# Altium PCB BT840_Temp.PcbDoc
Units mm, origin at the board's own origin, x right, y up, seen from the top; angles counter-clockwise.
Board outline 40 x 40 mm, 2 copper layers (Top Layer, Bottom Layer); 14 components, 10 nets, 93 pads, 2 vias.
Unrouted connection lines stored in the file: 2.
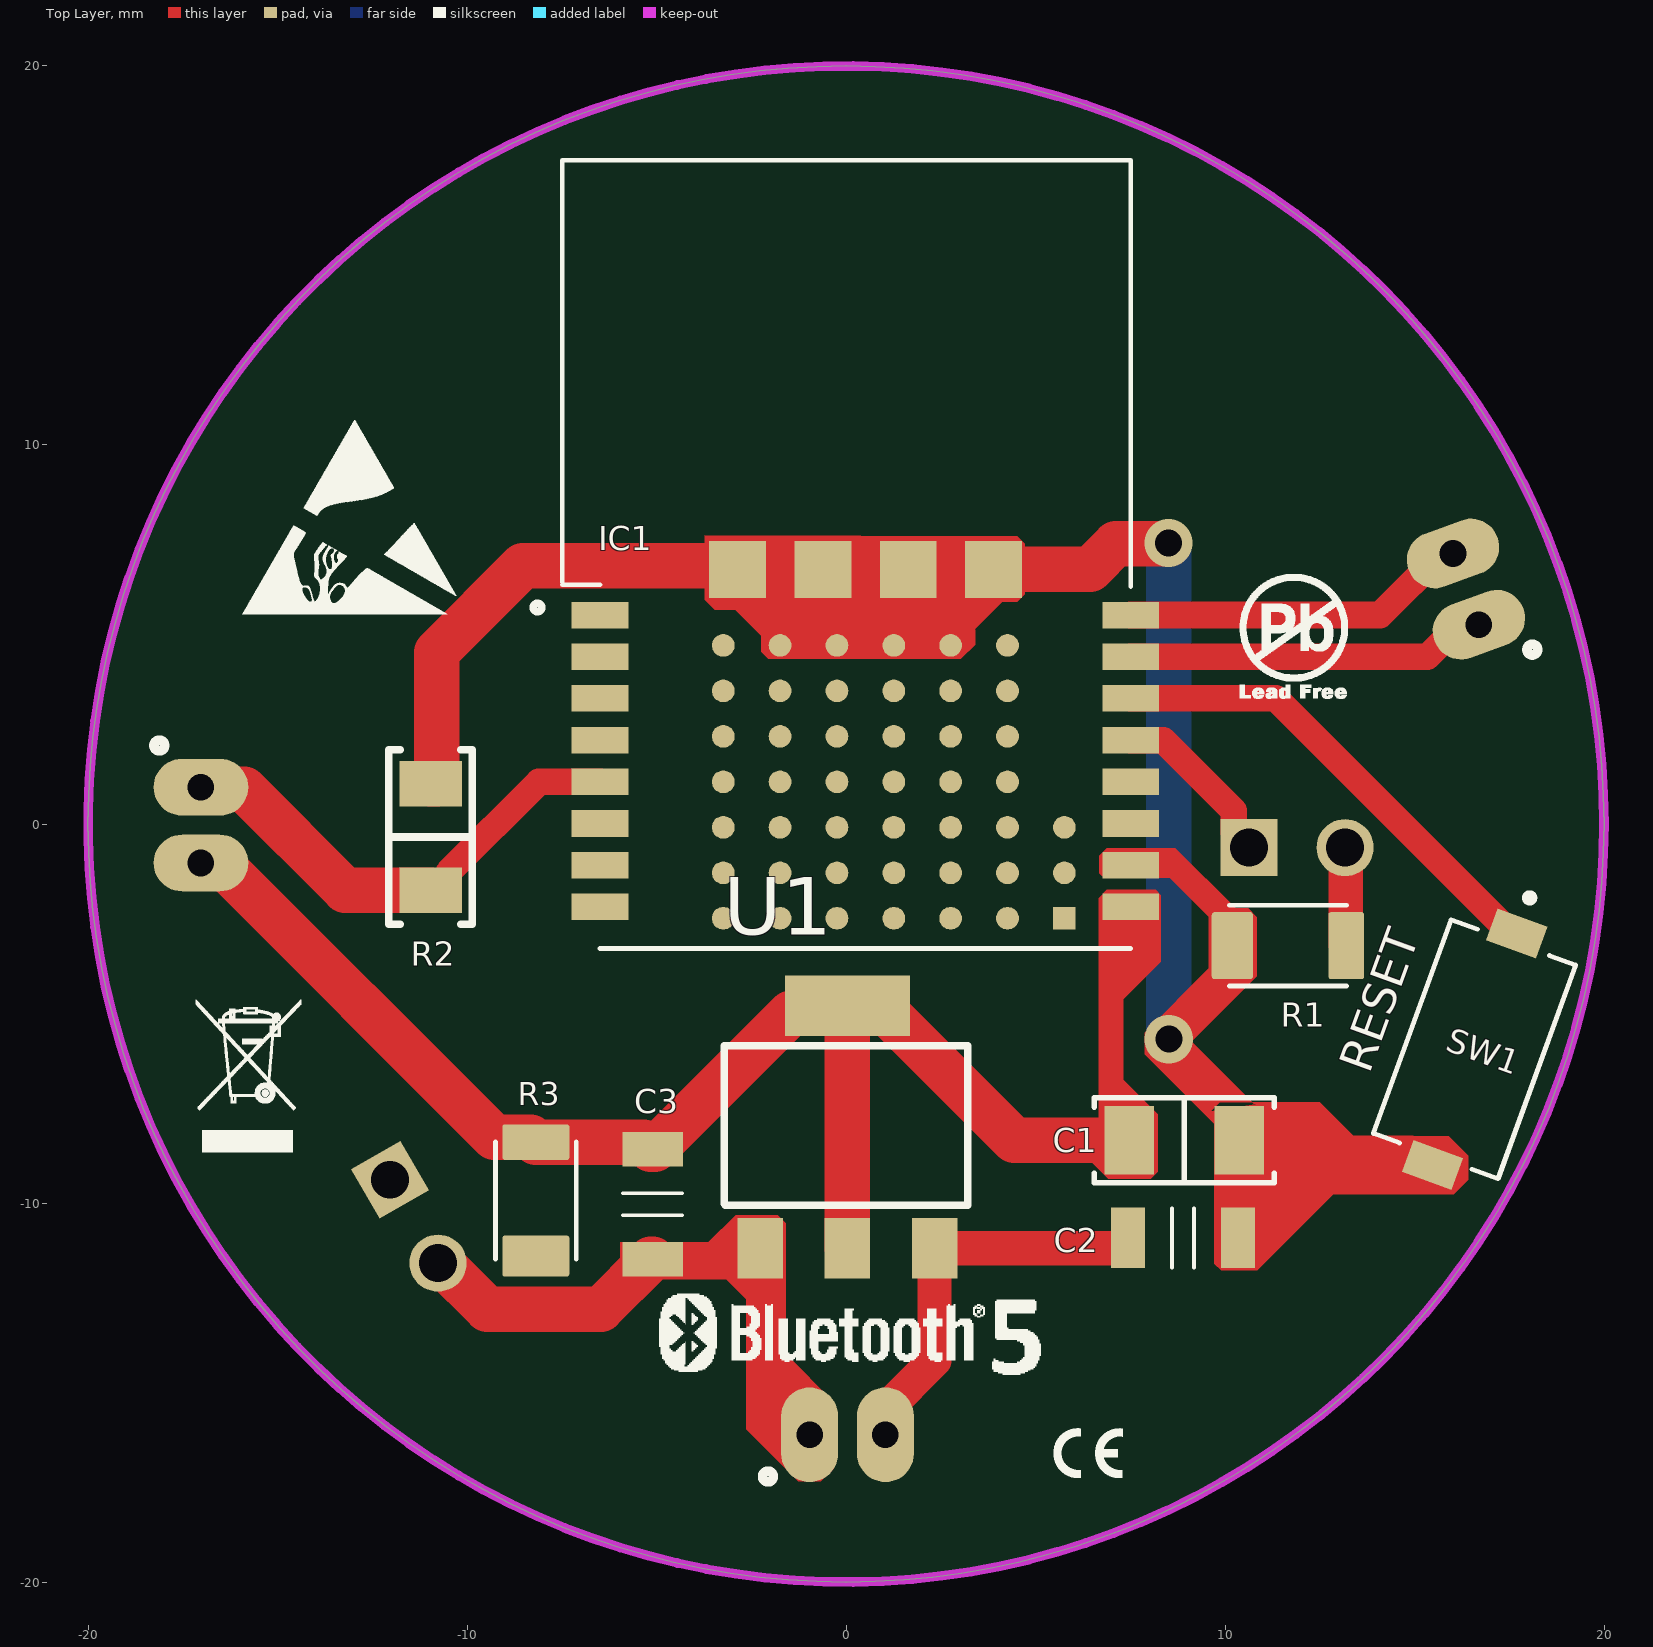
[diagram p0: Top Layer view]
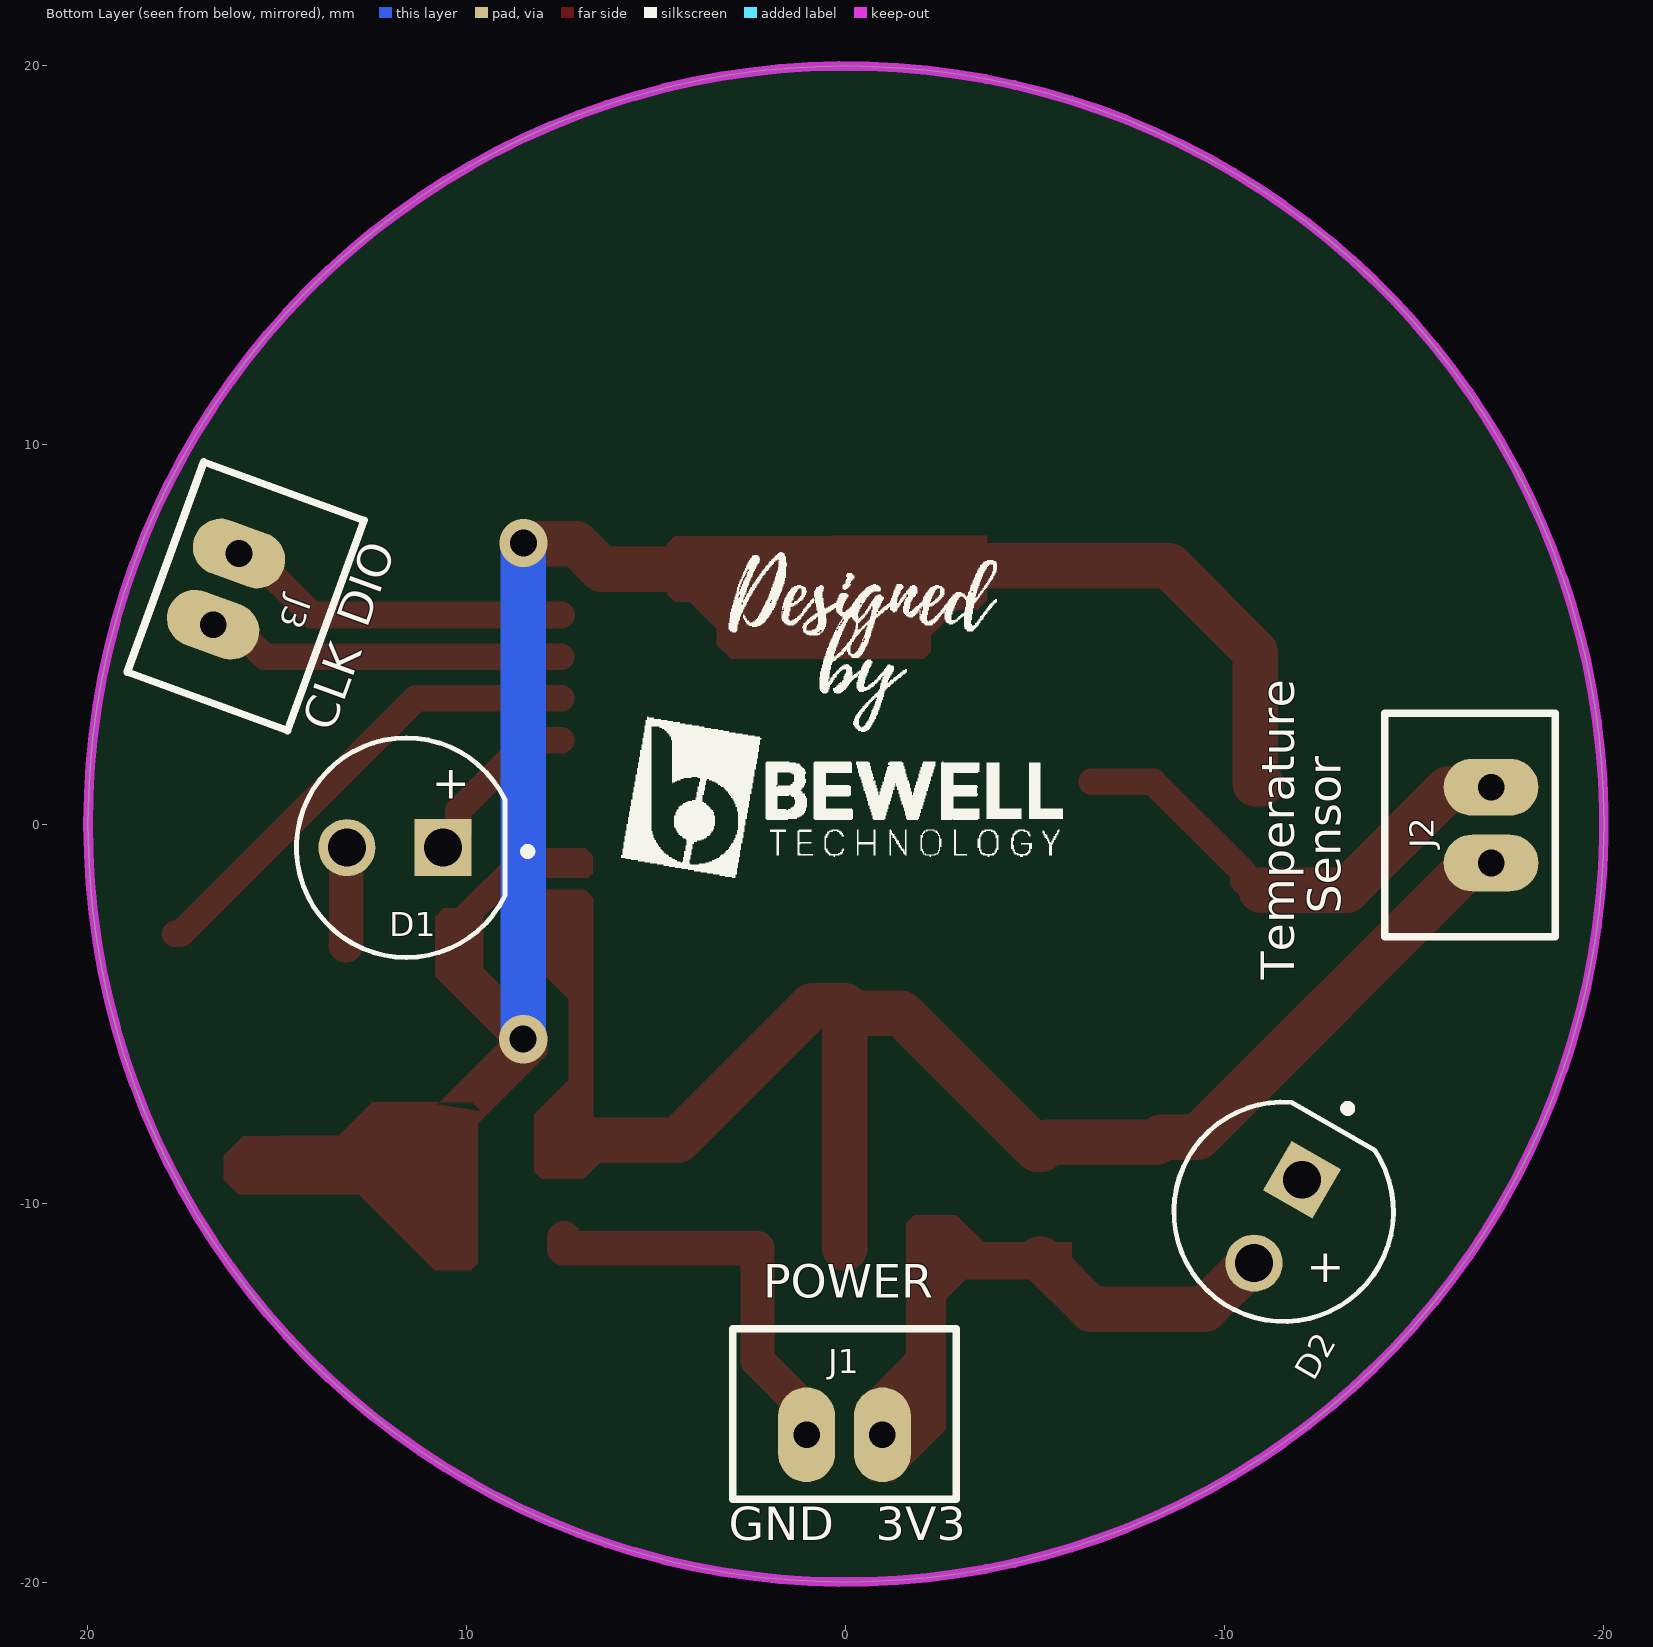
[diagram p1: Bottom Layer view, seen from below]
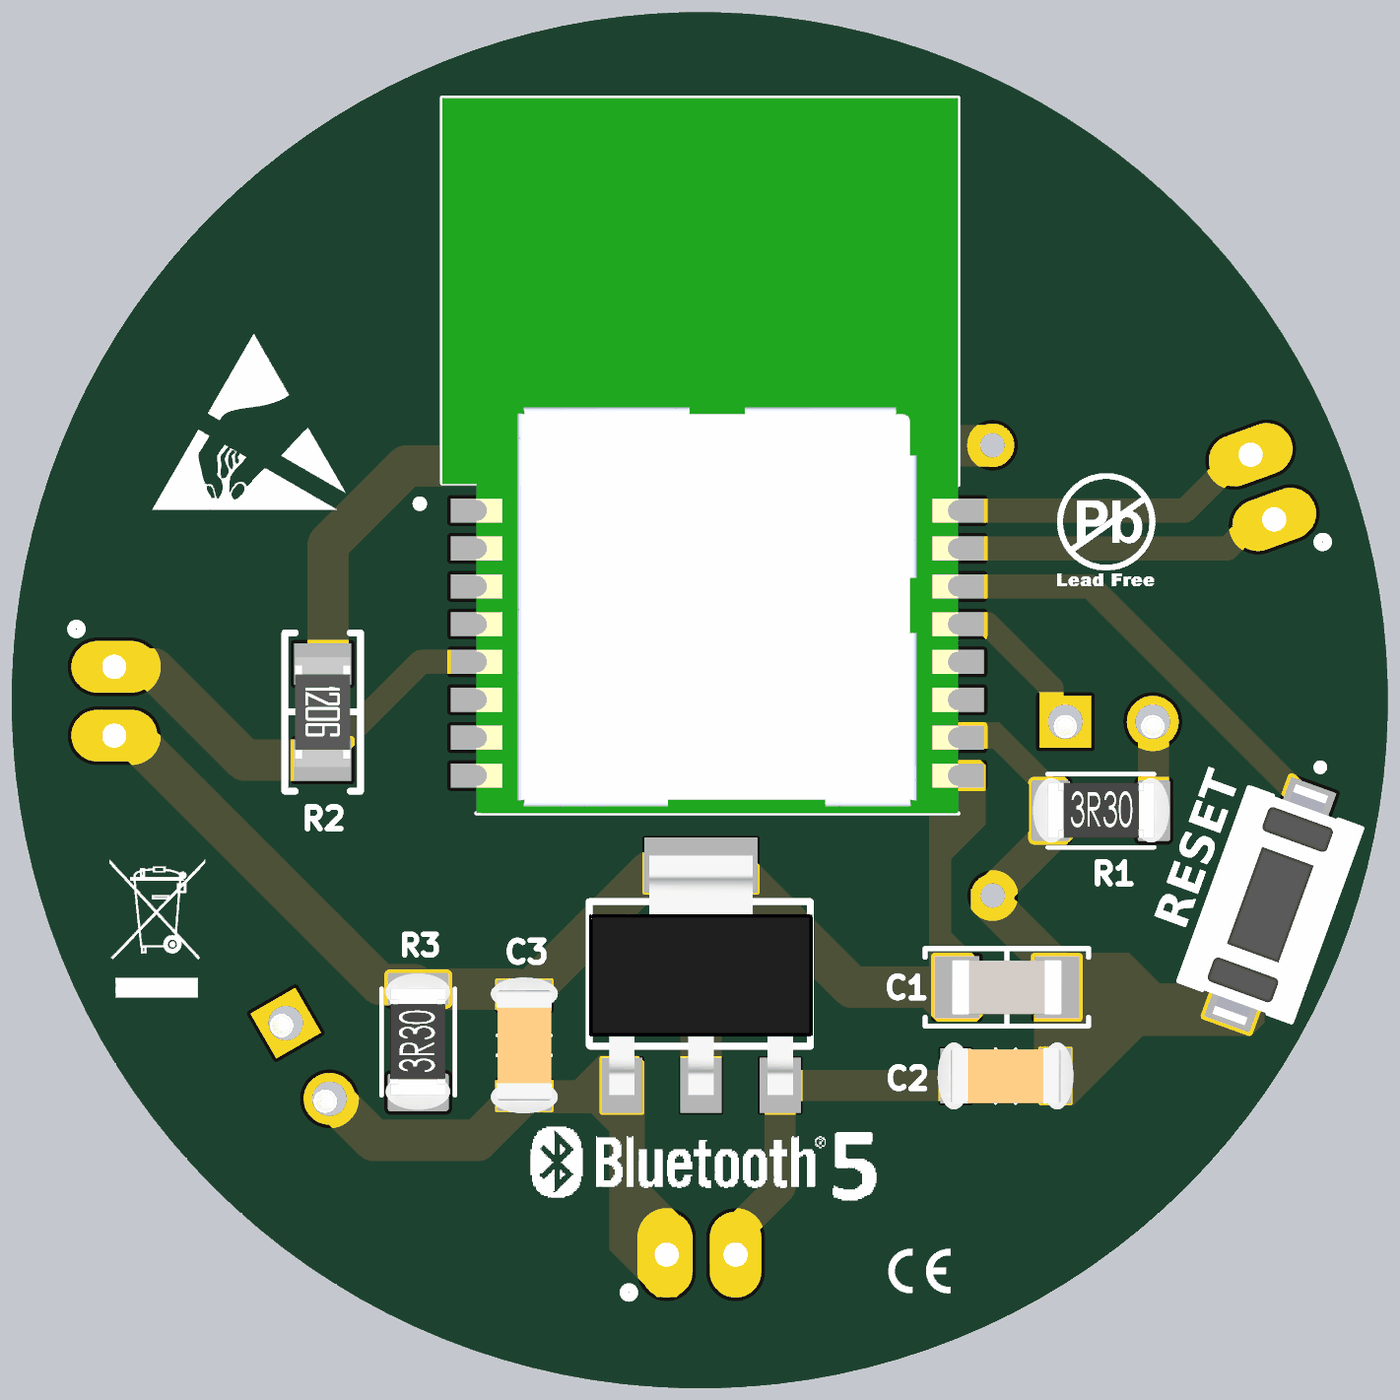
[diagram p2: 3D render of the assembled board from above, using the file's embedded part models]
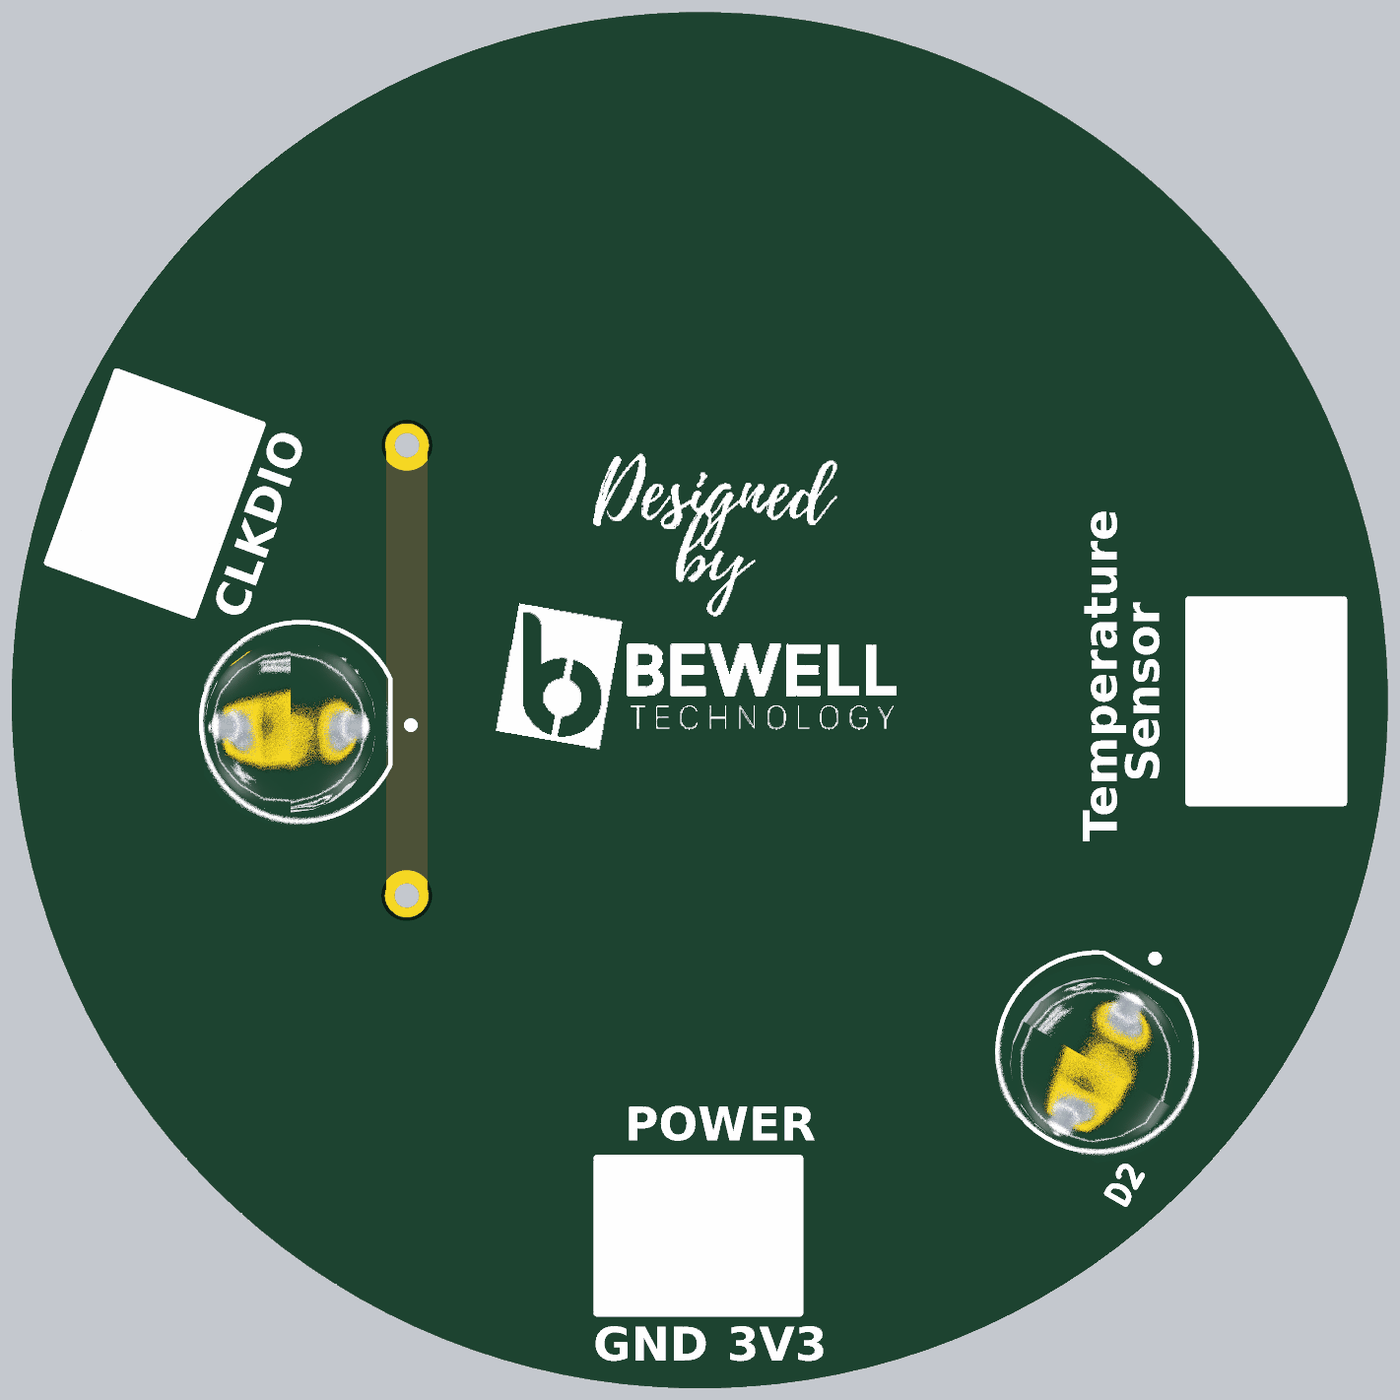
[diagram p3: 3D render of the assembled board from below, using the file's embedded part models]

## Layer stack, top to bottom
Top Solder: solder mask 0.0102, Solder Resist, Dk 3.5
Top Layer: signal copper 0.0356
Dielectric 1: dielectric 0.32, FR-4, Dk 4.8
Bottom Layer: signal copper 0.0356
Bottom Solder: solder mask 0.0102, Solder Resist, Dk 3.5

## Board outline
-20.012,0 ccw(c-0.012,0) -0.012,-20 ccw(c-0.012,0) 19.988,0 ccw(c-0.012,0) -0.012,20 ccw(c-0.012,0)

## Design rules (kind name [scope] priority, off if disabled: settings)
Clearance [All] p1: gap=0.254 ignorepadtopadclearanceinfootprint=FALSE except(0: Arc-Hole Track-Hole SMDPad-Hole THPad-Hole Via-Hole Fill-Hole Poly-Hole Region-Hole Text-Hole)
PolygonConnect [All] p1: connectstyle=Relief reliefconductorwidth=0.254 reliefentries=4 polygonreliefangle="90 Angle" airgapwidth=0.254
RoutingVias [All] p1: holewidth=0.711 width=1.27 viastyle="Through Hole" minholewidth=0.1 minwidth=0.1 maxholewidth=5 maxwidth=5
SolderMaskExpansion [All] p1: expansion=0.102 istentingtop=FALSE
Width [All] p1: maxlimit=20 minlimit=0.254 preferedwidth=0.254 minimp=50.000000 maximp=50.000000 favimp=50.000000
30 further rules are at their usual default settings.

## Components (designator, comment, footprint, x,y, rotation, side; value= is the part's Value field where it differs from the comment)
C1 "47µF" "CAP 1206_3216 - 1.8MM" 8.915,-8.344 r180 top
C2 "C1206C106J4RAC7800" CAP_1206 8.878,-10.921 r180 top
C3 "C1206C106J4RAC7800" CAP_1206 -5.111,-10.033 r90 top
D1 "LED TH" TH_LED 11.887,-0.624 r0 bottom
D2 "LED TH" TH_LED -11.411,-10.486 r300 bottom
IC1 "BT480F" BT840F 0,7.113 r0 top
J1 "B2B-PH-K-S(LF)(SN)" "JST B2B-PH-K" 0.029,-16.116 r0 bottom
J2 "B2B-PH-K-S(LF)(SN)" "JST B2B-PH-K" -17.031,-0.029 r270 bottom
J3 "B2B-PH-K-S(LF)(SN)" "JST B2B-PH-K" 16.346,6.197 r110 bottom
R1 "RT1206BRD07300RL" RES_1206 11.659,-3.2 r0 top
R2 "100 kOhms" "RES 1206_3216" -10.973,-0.343 r270 top
R3 "RT1206BRD07300RL" RES_1206 -8.205,-9.924 r90 top
SW1 "PTS636 SM43J SMTR LFS" SMD_Button 16.573,-5.944 r250 top
U1 "AMS1117-3.3V" SOT223 -0.015,-8.025 r0 top

## Footprints (in the part's own frame and the unit in brackets; to place one, negate y for a bottom-side part, rotate by r counter-clockwise, add the part's x,y. Pads: shape width x height; smd on the part's side, far side on the other; paste and mask are expansions set on the pad)
BT840F [mm]
  rect 1.5x0.7 smd: 1(-6.5,-1.6) 2(-6.5,-2.7) 3(-6.5,-3.8) 4(-6.5,-4.9) 5(-6.5,-6) 6(-6.5,-7.1) 7(-6.5,-8.2) 8(-6.5,-9.3) 9(7.5,-9.3) 10(7.5,-8.2) 11(7.5,-7.1) 12(7.5,-6) 13(7.5,-4.9) 14(7.5,-3.8) 15(7.5,-2.7) 16(7.5,-1.6)
  round 0.6 smd: A0(-1.75,-2.4) A1(-1.75,-3.6) A2(-1.75,-4.8) A3(-1.75,-6) A4(-1.75,-7.2) A5(-1.75,-8.4) A6(-1.75,-9.6) B0(-0.25,-2.4) B1(-0.25,-3.6) B2(-0.25,-4.8) B3(-0.25,-6) B4(-0.25,-7.2) B5(-0.25,-8.4) B6(-0.25,-9.6) C0(1.25,-2.4) C1(1.25,-3.6) C2(1.25,-4.8) C3(1.25,-6) C4(1.25,-7.2) C5(1.25,-8.4) C6(1.25,-9.6) D0(2.75,-2.4) D1(2.75,-3.6) D2(2.75,-4.8) D3(2.75,-6) D4(2.75,-7.2) D5(2.75,-8.4) D6(2.75,-9.6) E0(4.25,-2.4) E1(4.25,-3.6) E2(4.25,-4.8) E3(4.25,-6) E4(4.25,-7.2) E5(4.25,-8.4) E6(4.25,-9.6) F4(5.75,-7.2) F5(5.75,-8.4) Z0(-3.25,-2.4) Z1(-3.25,-3.6) Z2(-3.25,-4.8) Z3(-3.25,-6) Z4(-3.25,-7.2) Z5(-3.25,-8.4) Z6(-3.25,-9.6)
  rect 1.5x1.5 smd: F0(-2.87,-0.4) F1(-0.62,-0.4) F2(1.63,-0.4) F3(3.88,-0.4)
  rect 0.6x0.6 smd: F6(5.75,-9.6)
  silkscreen extent -8.26,-10.4 7.5,10.4, body extent -7.5,-10.4 7.5,10.4, height 1.9
"CAP 1206_3216 - 1.8MM" [mm] "Chip Capacitor, 2-Leads, Body 3.25x1.60mm, IPC Medium Density"
  rect 1.3x1.8 smd: 1(-1.45,0) 2(1.45,0)
  silkscreen extent -2.37,-1.12 2.37,1.12, body extent -1.6,-0.8 1.6,0.8, height 1.8
CAP_1206 [mm]
  rect 0.9x1.6 smd mask+0.05: 1(-1.45,0) 2(1.45,0)
  silkscreen extent -0.29,-0.78 0.29,0.79, body extent -1.97,-0.98 1.97,0.98, height 1.3
"JST B2B-PH-K" [mm]
  oval 1.5x2.5 hole 0.7: 1(-1,0) 2(1,0)
  silkscreen extent -2.95,-2.8 2.95,1.7, body extent -2.95,-2.8 2.95,1.7, height 6
"RES 1206_3216" [mm] "Chip Resistor, 2-Leads, Body 3.13x1.55mm, IPC Medium Density"
  rect 1.2x1.65 smd: 1(-1.4,0) 2(1.4,0)
  silkscreen extent -2.3,-1.1 2.3,1.1, body extent -1.6,-0.8 1.6,0.8, height 0.6
RES_1206 [mm]
  rrect14% 1.09x1.77 smd: 1(-1.475,-0.01)
  rrect14% 0.94x1.77 smd: 2(1.53,-0.01)
  silkscreen extent -1.56,-1.07 1.54,1.05, body extent -1.98,-0.94 1.98,0.94, height 0.55
SMD_Button [mm]
  rect 0.9x1.4 smd: 1(-3.25,0) 2(3.25,0)
  silkscreen extent -4.35,-1.75 3,1.75, body extent -3.55,-1.75 3.55,1.75, height 4.3
SOT223 [mm]
  rect 1.2x1.6 smd mask+0.05: 1(-2.26,-3.17) 2(0.04,-3.17) 3(2.34,-3.17)
  rect 3.3x1.6 smd mask+0.05: 2(0.04,3.23)
  silkscreen extent -3.21,-2.03 3.22,2.17, body extent -3.21,-3.45 3.29,3.51, height 1.65
TH_LED [mm]
  round 1.508 hole 1: 1(1.27,0)
  rect 1.508x1.508 hole 1: 2(-1.27,0)
  silkscreen extent -3.6,-2.9 2.6,2.9, body extent -2.9,-2.76 2.51,3.04, height 12.1

## Part data
C1: library part 12066D476MAT2A, "CAP CER 47UF 6.3V X5R 1206", Device Package="1206 (3216 Metric)", Manufacturer="AVX Corporation", Operating Temperature="-55°C ~ 85°C", Supplier Part Number 1=478-4532-1-ND, Temperature Coefficient=X5R, Tolerance=±20%, Voltage - Rated=6.3V, Applications="General Purpose", Capacitance=47µF, ComponentLink1Description=Datasheet, ComponentLink1URL=http://datasheets.avx.com/cx5r.pdf, ComponentLink2Description="DigiKey Link", ComponentLink2URL=http://digikey.com/product-detail/en/avx-corporation/12066D476MAT2A/478-4532-1-ND/1645883, lastupdated="2.09.2020 01:05:23", Lifecycle Status=Active, Minimum Order=1, Mounting Type="Surface Mount, MLCC", Package / Case="1206 (3216 Metric)", Packaging=TapeAndReel, Part Number=12066D476MAT2A, Part Status=Active, partid=22636, price=0.23, Series=-, Size / Dimension="0.126\" L x 0.063\" W (3.20mm x 1.60mm)", Supplier 1=DigiKey, Thickness (Max)="0.070\" (1.78mm)"
C2 C3: library part "CAP 10uF 1206", "Cap Ceramic 10uF 16V ±%5 SMD 1206", Capacitance=10uF, Case Code (Metric)=3216, Case Code (Imperial)=1206, Dielectric=X7R, Dielectric Material=Ceramic, Manufacturer=KEMET, Manufacturer Part Number=C1206C106J4RACTU, Max Operating Temperature=125°C, Min Operating Temperature=-55°C, Package Quantity=1, Tolerance=5%, Voltage Rating=16V, Case/Package=1206, Category="Ceramic Capacitors", ComponentLink1Description=http://www.farnell.com/datasheets/2746115.pdf?src-supplier=Farnell, ComponentLink1URL=http://www.farnell.com/datasheets/2746115.pdf?src-supplier=Farnell, ComponentLink2Description=http://www.mouser.com/ds/2/212/KEM_C1002_X7R_SMD-1102033.pdf?src-supplier=Mouser, ComponentLink2URL=http://www.mouser.com/ds/2/212/KEM_C1002_X7R_SMD-1102033.pdf?src-supplier=Mouser, ComponentLink3Description=http://components.arrow.com/part/dataview/46514886S8616008N7429?src-supplier=Arrow+Electronics, ComponentLink3URL=http://components.arrow.com/part/dataview/46514886S8616008N7429?src-supplier=Arrow+Electronics, ComponentLink4Description=https://api.kemet.com/component-edge/download/datasheet/C1206C106J4RACTU.pdf?src-supplier=Digi-Key, ComponentLink4URL=https://api.kemet.com/component-edge/download/datasheet/C1206C106J4RACTU.pdf?src-supplier=Digi-Key, ComponentLink5Description=http://www.farnell.com/datasheets/2746115.pdf?src-supplier=Newark, ComponentLink5URL=http://www.farnell.com/datasheets/2746115.pdf?src-supplier=Newark, ComponentLink6Description=http://capacitoredge.kemet.com/capedge2/DataSheet?pn=C1206C106J4RAC7800&src-supplier=Avnet, ComponentLink6URL=http://capacitoredge.kemet.com/capedge2/DataSheet?pn=C1206C106J4RAC7800&src-supplier=Avnet, ComponentLink7Description=http://www.farnell.com/datasheets/2746115.pdf?src-supplier=Element14, ComponentLink7URL=http://www.farnell.com/datasheets/2746115.pdf?src-supplier=Element14, Depth=1.6mm, Designed by="Semih AŞÇI", Dissipation Factor=5%, Height=1.6mm, Length=3.2mm, Mount="Surface Mount", Packaging="Tape and Reel", Pricing 1="1=1,52130, 10=1,12380 (USD)", Radiation Hardening=No, REACH SVHC="No SVHC", RoHS=Yes, RoHS Compliant=Yes, Series=C, Stock 1=10, Supplier 1="Arrow Electronics", Supplier Part Number 1=C1206C106J4RACTU, Termination=SMD/SMT, Thickness=0.071inch, Voltage Rating (DC)=16V, Width=0.063inch
D1 D2: "Radial red led", Designed by="Semih AŞÇI"
IC1: library part BT840F, "BLE 5 Module: Nordic nRF52840 SoC (Range 930 Meters)", Case/Package=SMD/SMT, Frequency=2.4GHz, Manufacturer=Fanstel, Max Operating Temperature=85°C, Min Operating Temperature=-40°C, Supplier Part Number 1=1914-1019-1-ND, Category="RF Receivers, Transceivers", ComponentLink1Description=http://www.fanstel.com/s/BlueNor_BT840F_datasheets.pdf?src-supplier=Digi-Key, ComponentLink1URL=http://www.fanstel.com/s/BlueNor_BT840F_datasheets.pdf?src-supplier=Digi-Key, Data Rate=12Mbps, Designed by="Semih AŞÇI", Manufacturer Part Number=BT840F, Memory Size=256KB, Mount="Surface Mount", Packaging="Tape and Reel", Pricing 1="1=14,04000, 10=12,70700, 25=11,70400, 100=10,70080, 250=10,03200, 500=9,36320 (USD)", RoHS=No, Sensitivity=-96dBm, Supplier 1=Digi-Key, Interface=SPI,USB
J1 J2 J3: "CONN HEADER VERT 2POS 2MM", Current Rating (Amps)=2A, Manufacturer="JST Sales America Inc.", Material Flammability Rating="UL94 V-0", Operating Temperature="-25°C ~ 85°C", Supplier Part Number 1=455-1704-ND, Voltage Rating=100V, Insulation Color=Natural, ComponentLink1Description=Datasheet, ComponentLink1URL=http://www.jst-mfg.com/product/pdf/eng/ePH.pdf, ComponentLink2Description="DigiKey Link", ComponentLink2URL=http://digikey.com/product-detail/en/jst-sales-america-inc/B2B-PH-K-S-LF-SN/455-1704-ND/926611, Connector Type=Header, Contact Finish - Mating=Tin, Contact Finish - Post=Tin, Contact Length - Mating="0.130\" (3.30mm)", Contact Length - Post="0.134\" (3.40mm)", Contact Material=Brass, Contact Shape=Square, Contact Type="Male Pin", Fastening Type="Detent Lock", lastupdated="3.01.2020 23:40:58", Lifecycle Status=Active, Minimum Order=1, Mounting Type="Through Hole", Number of Positions=2, Number of Positions Loaded=All, Number of Rows=1, Overall Contact Length="0.333\" (8.45mm)", Packaging=Bulk, Part Number=B2B-PH-K-S(LF)(SN), Part Status=Active, partid=11, Pitch - Mating="0.079\" (2.00mm)", price=0.17, Series=PH, Shrouding="Shrouded - 4 Wall", Style="Board to Cable/Wire", Supplier 1=DigiKey, Termination="Press-Fit, Solder", Insulation Height="0.236\" (6.00mm)", Insulation Material="Polyamide (PA66), Nylon 6/6"
R1 R3: library part "RES 300 OHM 1206", "Res 300 Ohm %0.1   SMD 1206", Case Code (Metric)=3216, Case Code (Imperial)=1206, Manufacturer=Yageo, Max Operating Temperature=125°C, Max Power Dissipation=250mW, Min Operating Temperature=-55°C, Resistance=300R, Resistor Type="Thin Film", Supplier Part Number 1=13-RT1206BRD07300RLCT-ND, Temperature Coefficient=25ppm/°C, Tolerance=0.1%, Voltage Rating=200V, Case/Package=1206, Category="Chip SMD Resistors", ComponentLink1Description=https://datasheet.ciiva.com/8886/pyu-rt-1-to-0-05-rohs-l-4-8886328.pdf?src-supplier=Avnet, ComponentLink1URL=https://datasheet.ciiva.com/8886/pyu-rt-1-to-0-05-rohs-l-4-8886328.pdf?src-supplier=Avnet, ComponentLink2Description=https://datasheet.ciiva.com/12705/pyu-rt-1-to-0-05-rohs-l-4-12705053.pdf?src-supplier=Mouser, ComponentLink2URL=https://datasheet.ciiva.com/12705/pyu-rt-1-to-0-05-rohs-l-4-12705053.pdf?src-supplier=Mouser, Contact Plating=Tin,Matte, Designed by="Semih AŞÇI", Height=550um, Lead Free="Lead Free", Length=3.1mm, Manufacturer Part Number=RT1206BRD07300RL, Number of Terminations=2, Packaging="Tape and Reel", Power Rating=250mW, Pricing 1="1=0,65000, 10=0,50000, 100=0,21000, 1000=0,11585, 2500=0,10861 (USD)", Radiation Hardening=No, RoHS=Yes, RoHS Compliant=Yes, Series=RT, Stock 1=18682, Supplier 1=Digi-Key, Termination=SMD/SMT, Voltage Rating (DC)=200V, Width=1.6mm
R2: library part RNCS1206BKE100K, "RES 100K OHM 0.1% 1/8W 1206", Device Package="1206 (3216 Metric)", Manufacturer="Stackpole Electronics Inc", Operating Temperature="-55°C ~ 155°C", Power (Watts)="0.125W, 1/8W", Ratings=AEC-Q200, Supplier Device Package=1206, Supplier Part Number 1=RNCS1206BKE100KCT-ND, Temperature Coefficient=±25ppm/°C, Tolerance=±0.1%, ComponentLink1Description=Datasheet, ComponentLink1URL=https://www.seielect.com/catalog/sei-rncs_rnch.pdf, ComponentLink2Description="DigiKey Link", ComponentLink2URL=https://www.digikey.com/en/products/detail/stackpole-electronics-inc/RNCS1206BKE100K/1800321, Composition="Thin Film", Features="Anti-Corrosive, Automotive AEC-Q200, Moisture Resistant", Height - Seated (Max)="0.026\" (0.65mm)", lastupdated="19.09.2022 13:29:58", Lifecycle Status=Active, Minimum Order=1, Number of Terminations=2, Package / Case="1206 (3216 Metric)", Packaging=TapeAndReel, Part Number=RNCS1206BKE100K, Part Status=Active, partid=26854, price=0.08, Resistance="100 kOhms", Series=RNCS, Size / Dimension="0.120\" L x 0.061\" W (3.05mm x 1.55mm)", Supplier 1=DigiKey
SW1: library part "SMD Button", "PTS636 Series SPST-NO Off-Mom 180 gf Top Actuated J Lead SMT Tactile Switch", Manufacturer="ITT C&K", Manufacturer Part Number=PTS636SM43JSMTRLFS, Supplier Part Number 1=CKN12317-1-ND, Designed by="Semih AŞÇI", Pricing 1="1=0,15000, 10=0,14300, 25=0,13520, 100=0,12300, 250=0,11568, 500=0,10582 (USD)", RoHS=No, Stock 1=11521, Supplier 1=Digi-Key
U1: library part "AMS1117-3.3V SMD", "3.3V Voltage regulator", Manufacturer="Advanced Monolithic Systems", Manufacturer Part Number=AMS1117-3.3, Designed by="Semih AŞÇI", RoHS Compliant=Yes

## Via types
v1: diameter 1.27, hole 0.711, Top Layer to Bottom Layer, 2 vias

## Nets (pads, with @x,y where several pads share a name; then routed paths per layer and width w, separated by ;. In a path a pad name is that pad's centre, name@x,y a point inside that pad or via, vN(x,y) a via of type N, cw(c..) or ccw(c..) an arc to the next point about the centre after c; other vN are vias at no path point)
+3V3: C1.2 C3.2 IC1.9 J2.2 R3.2 U1.2 | length 36.9
  Top Layer w1.2: J2.2 -16.531,-1.029 -9.295,-8.264 -8.325,-8.264 R3.2 -5.35,-8.394 -5.161,-8.583 C3.2 -5.061,-8.583 -1.473,-4.995 0.025,-4.995 U1.2@0.025,-11.195 ; U1.2@0.025,-4.795 0.875,-4.795 4.424,-8.344 C1.2 C1.2@7.415,-8.294
GND: C1.1 C2.1 C3.1 D2.1 IC1.10 IC1.A0 IC1.B0 IC1.C0 IC1.D0 IC1.F0 IC1.F1 IC1.F2 IC1.F3 J1.1 R1.1 R2.1 SW1.2 U1.1 | length 39.4
  Top Layer w0.7: R1.1@10.184,-3.55 R1.1
  Top Layer w1.2: R2.1 -10.812,1.057 -10.812,4.536 -8.538,6.81 IC1.F1@-1.079,6.81 ; D2.1 -10.693,-11.586 -9.481,-12.798 -6.476,-12.798 -5.161,-11.483 C3.1 ; IC1.F3 4.026,6.713 4.03,6.717 6.43,6.717 7.112,7.399 8.485,7.399 v1(8.498,7.412)
  Bottom Layer w1.2: v1(8.498,7.412) 8.501,7.408 8.501,-5.674 v1(8.505,-5.678)
LED: D1.2 IC1.13 | length 4.6
  Top Layer w0.7: IC1.13 8.354,2.213 10.213,0.354 10.213,-0.22 D1.2
NetD1_1: D1.1 R1.2 | length 2.6
  Top Layer w0.9: D1.1 13.173,-0.64 13.173,-3.195 R1.2
NetD2_2: D2.2 R3.1
NetSW1_1: IC1.14 SW1.1 | length 12.8
  Top Layer w0.7: IC1.14 11.333,3.313 17.536,-2.89 SW1.1
SWCLK: IC1.15 J3.1 | length 9.5
  Top Layer w0.7: IC1.15 15.328,4.413 16.172,5.258 J3.1
SWDIO: IC1.16 J3.2 | length 9.2
  Top Layer w0.711: IC1.16 14.081,5.513 15.705,7.137 J3.2
TEMP: IC1.5 J2.1 R2.2 | length 13
  Top Layer w0.7: R2.2 -10.748,-1.743 -10.498,-1.493 -10.498,-1.268 -8.117,1.113 IC1.5
  Top Layer w1.2: J2.1 -16.973,0.914 -15.887,0.914 -13.23,-1.743 R2.2
Vin: C2.2 J1.2 U1.3 | length 10.8
  Top Layer w0.9: J1.2 1.029,-15.454 2.325,-14.158 U1.3 7.428,-11.195 C2.2
pads on no net: IC1.1 IC1.2 IC1.3 IC1.4 IC1.6 IC1.7 IC1.8 IC1.11 IC1.12 IC1.A1 IC1.A2 IC1.A3 IC1.A4 IC1.A5 IC1.A6 IC1.B1 IC1.B2 IC1.B3 IC1.B4 IC1.B5 IC1.B6 IC1.C1 IC1.C2 IC1.C3 IC1.C4 IC1.C5 IC1.C6 IC1.D1 IC1.D2 IC1.D3 IC1.D4 IC1.D5 IC1.D6 IC1.E0 IC1.E1 IC1.E2 IC1.E3 IC1.E4 IC1.E5 IC1.E6 IC1.F4 IC1.F5 IC1.F6 IC1.Z0 IC1.Z1 IC1.Z2 IC1.Z3 IC1.Z4 IC1.Z5 IC1.Z6

## Keep-outs
Keep-Out Layer:
  circle w0.254: c-0.012,0 r20

## Other copper
Top Layer:
  region net +3V3: 6.653,-1.958 6.872,-1.739 8.156,-1.739 8.298,-1.881 8.298,-3.629 7.301,-4.626 7.301,-6.749 8.208,-7.656 8.208,-9.172 8.025,-9.355 6.902,-9.355 6.418,-8.871 6.418,-8.543 6.652,-8.309 6.652,-2.101
  region net GND: 9.611,-7.581 9.848,-7.344 12.483,-7.344 13.366,-8.227 14.954,-8.227 14.971,-8.244 15.89,-8.244 16.404,-8.758 16.404,-9.381 16.019,-9.766 12.85,-9.766 10.836,-11.78 9.884,-11.78 9.702,-11.598 9.702,-7.913 7.866,-6.077 7.866,-5.505 9.563,-3.808 9.563,-2.445 8.535,-1.417 6.786,-1.417 6.669,-1.3 6.669,-0.835 6.863,-0.641 8.682,-0.641 10.269,-2.228 10.604,-2.228 10.83,-2.454 10.83,-4.013 9.115,-5.728 9.115,-5.75 10.747,-7.382 10.879,-7.382
  region net GND: -5.972,-11.041 -3.641,-11.041 -2.917,-10.317 -1.818,-10.317 -1.607,-10.528 -1.607,-13.984 -0.339,-15.252 -0.339,-17.006 -0.677,-17.344 -1.269,-17.344 -2.637,-15.976 -2.637,-12.541 -3.165,-12.013 -5.797,-12.013 -5.966,-11.844
  region net GND: -3.744,7.613 -3.744,5.921 -3.475,5.653 -2.931,5.653 -2.251,4.973 -2.251,4.543 -2.064,4.355 3.023,4.355 3.394,4.727 3.394,5.132 3.388,5.138 4.109,5.858 4.503,5.858 4.704,6.058 4.704,7.395 4.503,7.596

## Silkscreen, mask and mechanical layers (free items; w line width, h text height)
Top Overlay:
  drawing of 3940 lines, arcs and shapes, not listed
  text "RESET" at 14.076,-6.723 h1.52 r70
Bottom Overlay:
  drawing of 26 lines, arcs and shapes, not listed
  text "DIO" at 12.356,5.034 h1.52 r290
  text "CLK" at 13.271,2.29 h1.52 r290
  text "+" at 10.923,0.372 h1.52
  text "Sensor" at -13.36,-2.37 h1.52 r270
  text "Temperature" at -12.132,-4.115 h1.52 r270
  text "+" at -12.155,-12.379 h1.52
  text "POWER" at 2.172,-12.789 h1.52
  text "3V3" at -0.8,-19.19 h1.52
  text "GND" at 3.086,-19.19 h1.52